# Altium PCB SATELLITE_4U_LASER_EXT_1.4.0.PcbDoc
Units mm, origin at the board's own origin, x right, y up, seen from the top; angles counter-clockwise.
Board outline 35.5 x 54.5 mm, 2 copper layers (Top Layer, Bottom Layer); 37 components, 23 nets, 230 pads, 13 vias.
Unrouted connection lines stored in the file: 51.
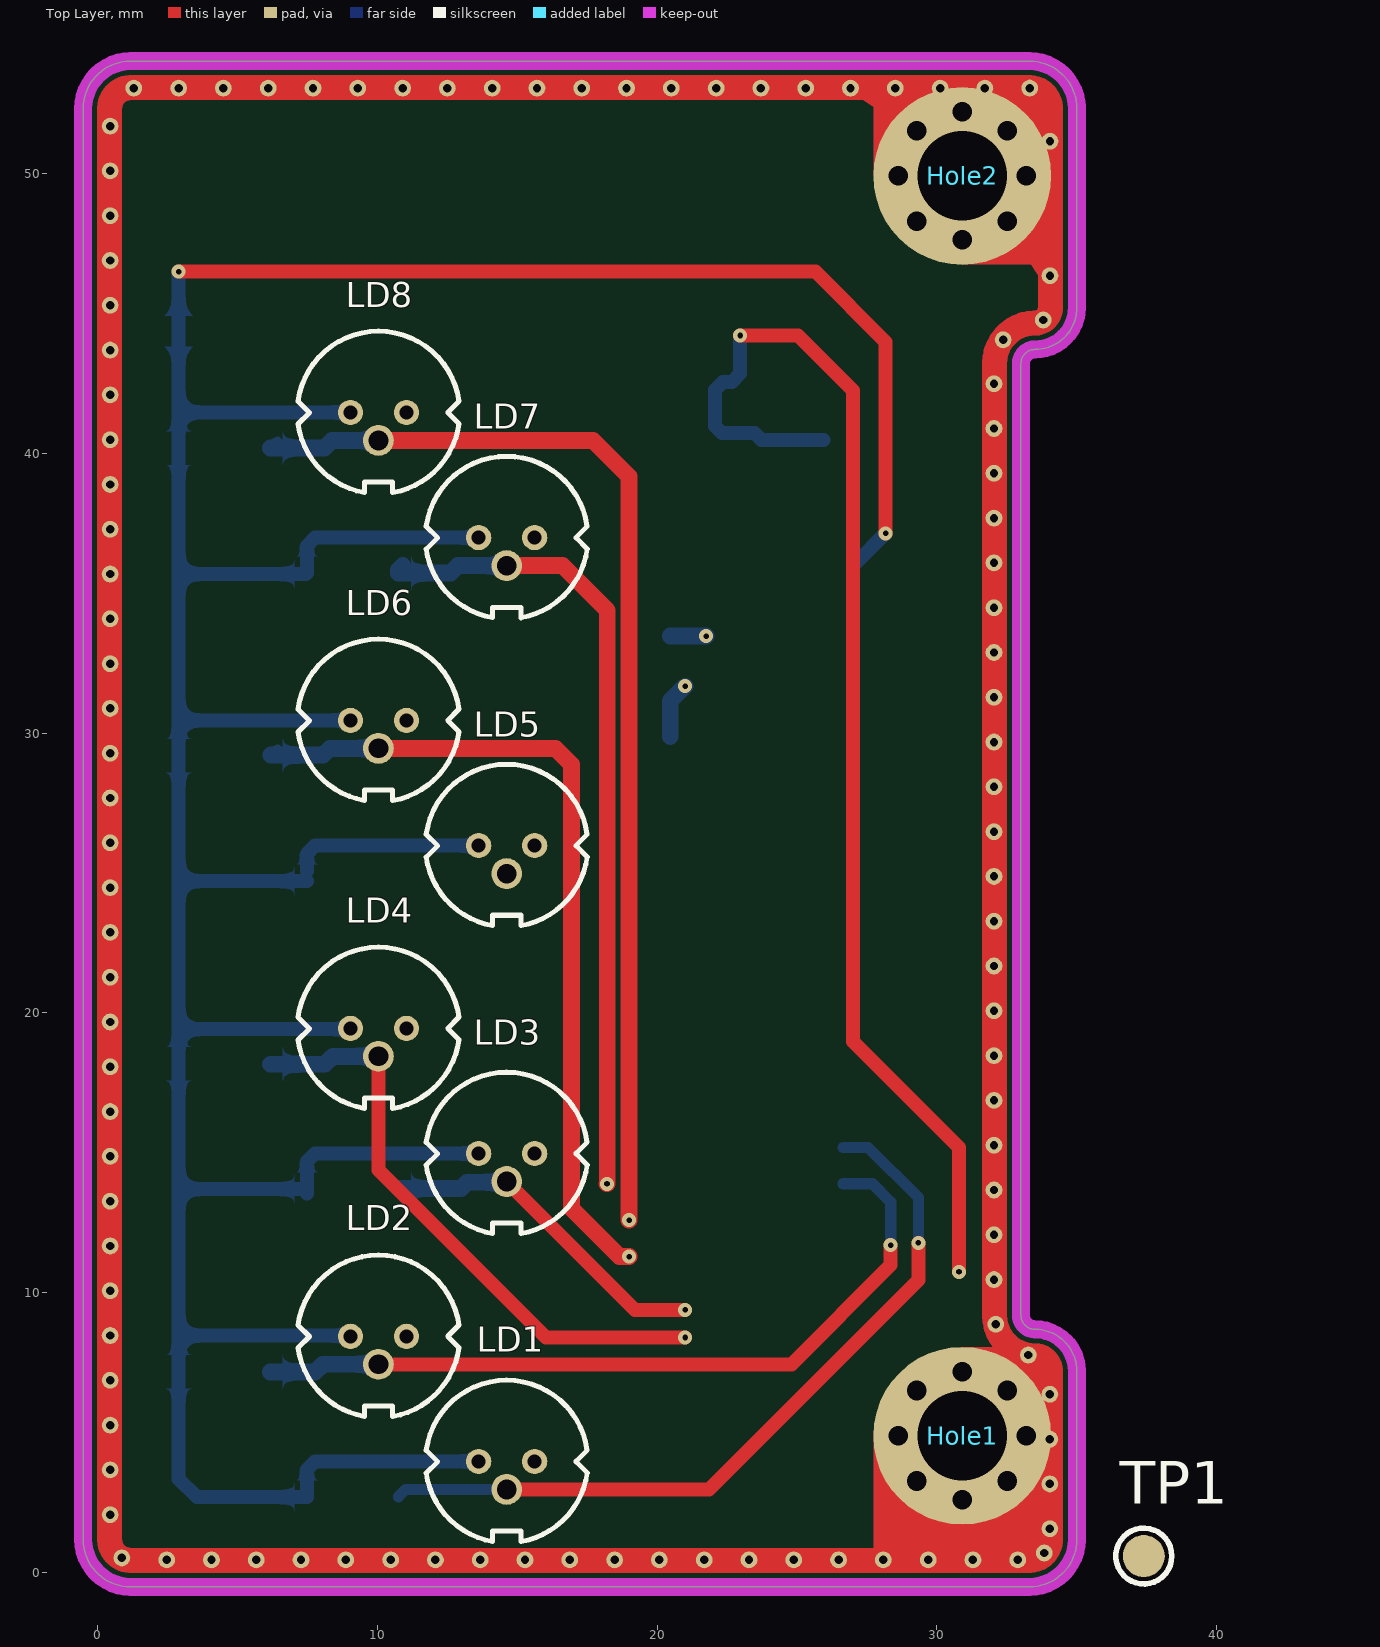
[diagram p0: Top Layer view]
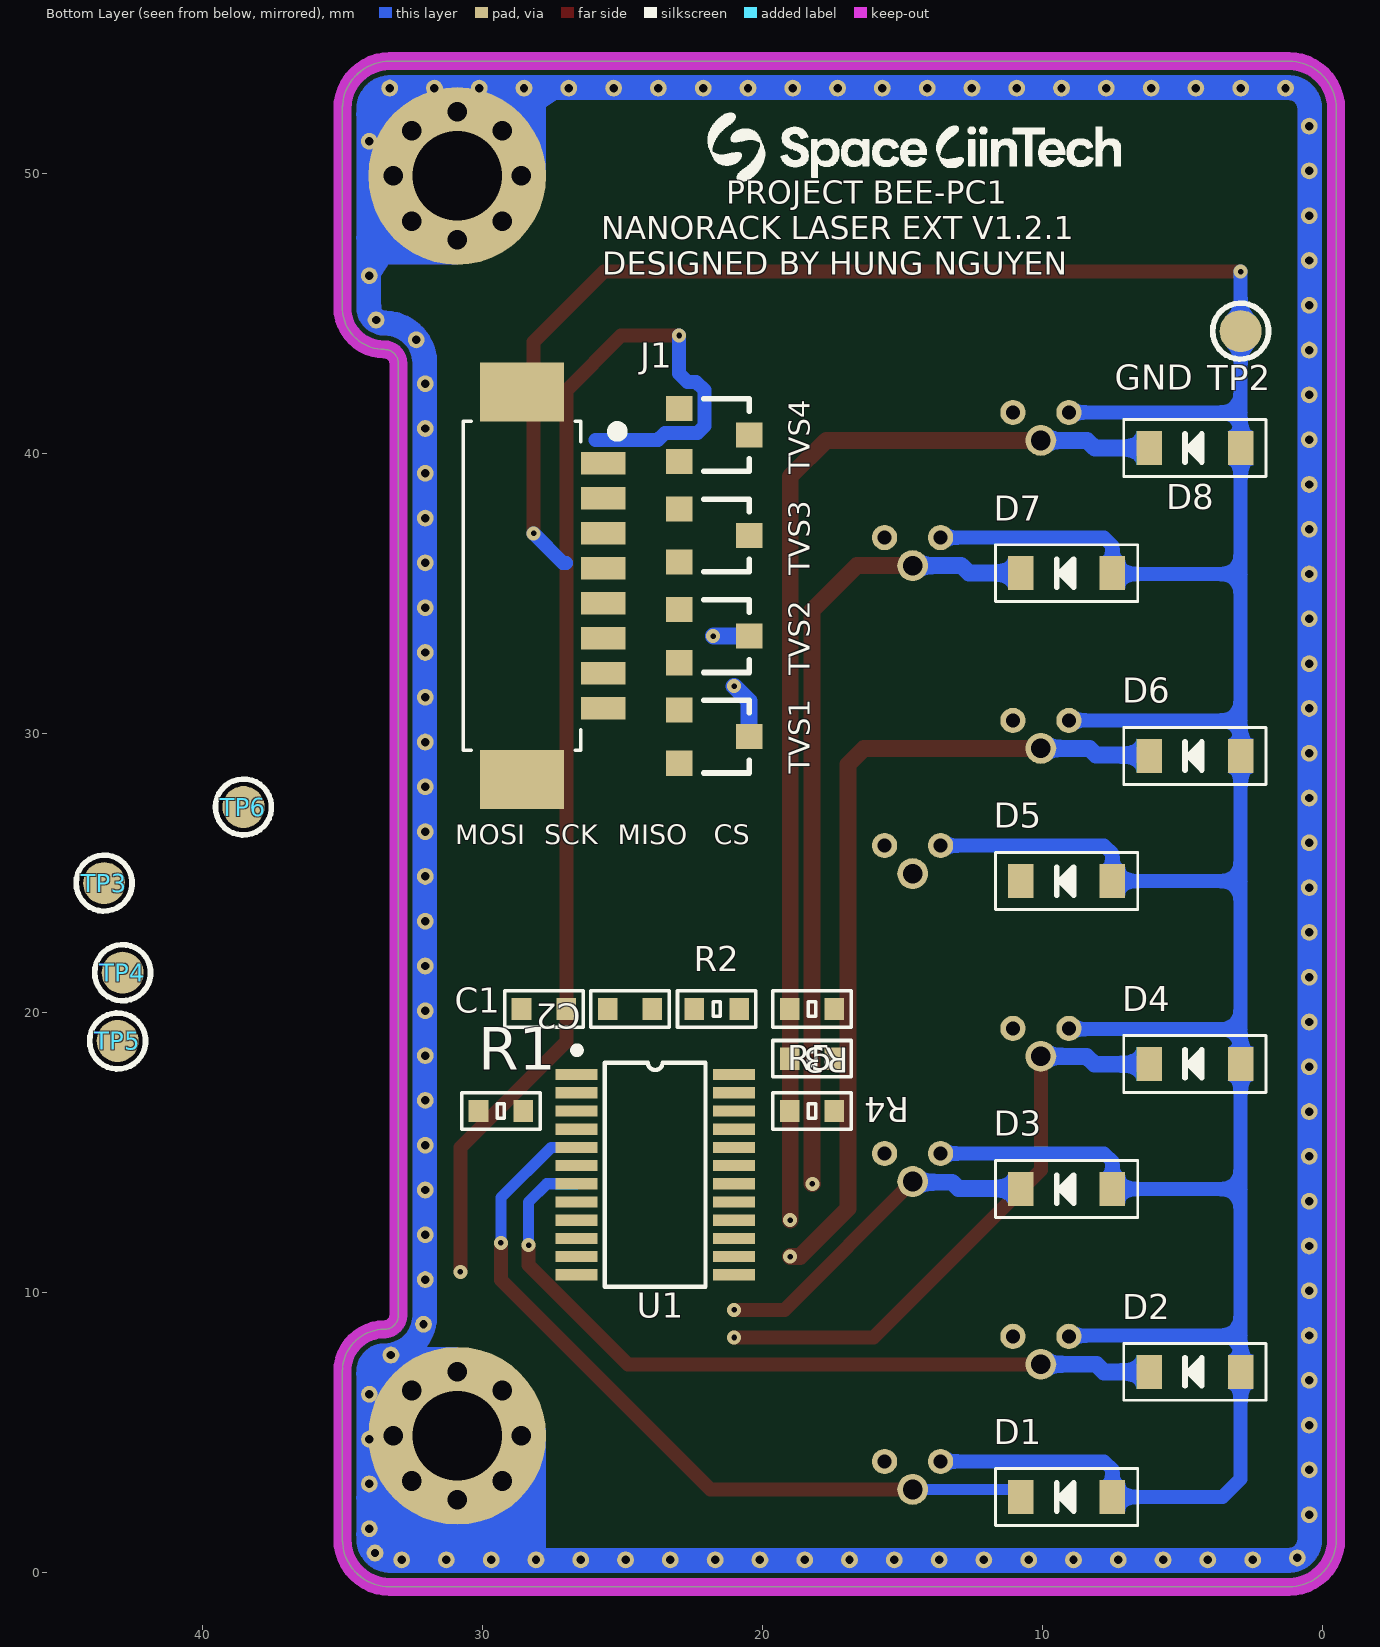
[diagram p1: Bottom Layer view, seen from below]

## Layer stack, top to bottom
Top Solder: solder mask 0.0102, Solder Resist, Dk 3.5
Top Layer: signal copper 0.0356
Dielectric 1: dielectric 0.32, FR-4, Dk 4.8
Bottom Layer: signal copper 0.0356
Bottom Solder: solder mask 0.0102, Solder Resist, Dk 3.5

## Board outline
-0.5,1.2 ccw(c1.2,1.2) 1.2,-0.5 33.3,-0.5 ccw(c33.3,1.2) 35,1.2 34.998,1.113 34.998,7.259 cw(c34.999,7.259) 34.999,7.26 35,7.2 ccw(c33.5,7.2) 33.5,8.7 cw(c33.5,9.2) 33,9.2 33,43.19 33,43.2 cw(c33.5,43.2) 33.499,43.7 33.5,43.7 ccw(c33.5,45.2) 35,45.2 35,45.176 35,52.399 ccw(c34.997,52.399) 34.997,52.402 35,52.3 ccw(c33.3,52.3) 33.3,54 1.2,54 ccw(c1.2,52.3) -0.5,52.3

## Design rules (kind name [scope] priority, off if disabled: settings)
Clearance [NOT InNet('PROTECT_EMI') and NOT OnLayer('Keep-Out Layer')] p1: gap=0.178 ignorepadtopadclearanceinfootprint=TRUE
HoleSize [All] p1: absolutevalues=TRUE maxlimit=3.2 minlimit=0.025 maxpercent=80.000 minpercent=20.000
MinimumSolderMaskSliver [All] p1: minsoldermaskwidth=0.14
PolygonConnect [All] p1: thpad.connectstyle=Relief thpad.reliefconductorwidth=0.254 thpad.reliefentries=4 thpad.polygonreliefangle="90 Angle" thpad.airgapwidth=0.254 smdpad.connectstyle=Relief smdpad.reliefconductorwidth=0.254 smdpad.reliefentries=4 smdpad.polygonreliefangle="90 Angle" smdpad.airgapwidth=0.254 via.connectstyle=Direct via.reliefconductorwidth=0.254 via.reliefentries=4 via.polygonreliefangle="90 Angle" via.airgapwidth=0.254
RoutingVias [All] p1: holewidth=0.3 width=0.7 viastyle="Through Hole" minholewidth=0.3 minwidth=0.6 maxholewidth=0.711 maxwidth=1.27
SilkToSolderMaskClearance [IsPad] p1: minsilkscreentomaskgap=0.15 clearancetoexposedcopper=TRUE
SolderMaskExpansion [All] p1: expansion=0.102 istentingtop=FALSE
SupplyNets "Schematic Supply Nets_3" [InNet('GND')] p1: voltage=0.000
SupplyNets "Schematic Supply Nets_2" [InNet('12V_EXP')] p2: voltage=0.000
SupplyNets "Schematic Supply Nets_1" [InNet('I_LD_EXT')] p3: voltage=0.000
SupplyNets "Schematic Supply Nets" [InNet('+3.3')] p4: voltage=0.000
Width [All] p1: maxlimit=1.27 minlimit=0.178 preferedwidth=0.381
27 further rules are at their usual default settings.

## Classes and differential pairs
component class COMMUNICATION: Hole1 Hole2 J1 TVS1 TVS2 TVS3 TVS4
component class SWITCH: C1 C2 D1 D2 D3 D4 D5 D6 D7 D8 LD1 LD2 LD3 LD4 LD5 LD6 LD7 LD8 q R1 R2 R3 R4 R5 TP1 TP2 TP3 TP4 TP5 TP6 U1

## Components (designator, comment, footprint, x,y, rotation, side; value= is the part's Value field where it differs from the comment)
C1 "0.22uF/25V" CN-SMD-0603 27.8,20.142 r0 bottom value=33pF
C2 "0.22uF/25V" CN-SMD-0603 24.727,20.142 r0 bottom value=33pF
D1 "1N4148W-TP" SOD123 9.13,2.71 r180 bottom value=1N5007
D2 "1N4148W-TP" SOD123 4.55,7.18 r180 bottom value=1N5007
D3 "1N4148W-TP" SOD123 9.13,13.71 r180 bottom value=1N5007
D4 "1N4148W-TP" SOD123 4.55,18.18 r180 bottom value=1N5007
D5 "1N4148W-TP" SOD123 9.13,24.71 r180 bottom value=1N5007
D6 "1N4148W-TP" SOD123 4.55,29.18 r180 bottom value=1N5007
D7 "1N4148W-TP" SOD123 9.13,35.71 r180 bottom value=1N5007
D8 "1N4148W-TP" SOD123 4.55,40.18 r180 bottom value=1N5007
Hole1 "Hole" "Hole space" 30.9,4.9 r0 top
Hole2 "Hole" "Hole space" 30.9,49.9 r0 top
J1 "0532610871" 0532610871 28.579,35.26 r270 bottom
LD1 "LaserDiode" LASER 14.63,3.98 r90 top
LD2 "LaserDiode" LASER 10.05,8.45 r90 top
LD3 "LaserDiode" LASER 14.63,14.98 r90 top
LD4 "LaserDiode" LASER 10.05,19.45 r90 top
LD5 "LaserDiode" LASER 14.63,25.98 r90 top
LD6 "LaserDiode" LASER 10.05,30.45 r90 top
LD7 "LaserDiode" LASER 14.63,36.98 r90 top
LD8 "LaserDiode" LASER 10.05,41.45 r90 top
R1 "22R 1%" RES-SMD-0603 29.337,16.499 r180 bottom
R2 "22R 1%" RES-SMD-0603 21.628,20.142 r0 bottom
R3 "22R 1%" RES-SMD-0603 18.224,20.142 r0 bottom
R4 "4.7K 1%" RES-SMD-0603 18.224,18.367 r0 bottom
R5 "22R 1%" RES-SMD-0603 18.224,16.499 r0 bottom
TP1 "" TESTPOINT 37.387,0.602 r0 top
TP2 "" TESTPOINT 2.915,44.354 r180 bottom
TP3 "" TESTPOINT 43.51,24.638 r0 bottom
TP4 "" TESTPOINT 42.85,21.438 r0 bottom
TP5 "" TESTPOINT 43.028,18.999 r0 bottom
TP6 "" TESTPOINT 38.532,27.356 r0 bottom
TVS1 "S2303" SOT23-123 21.721,29.87 r270 bottom
TVS2 "S2303" SOT23-123 21.721,33.462 r270 bottom
TVS3 "S2303" SOT23-123 21.721,37.054 r270 bottom
TVS4 "S2312" SOT23-123 21.721,40.645 r270 bottom
U1 "ADG1414BRUZ" TSSOP24 23.825,14.224 r180 bottom

## Footprints (in the part's own frame and the unit in brackets; to place one, negate y for a bottom-side part, rotate by r counter-clockwise, add the part's x,y. Pads: shape width x height; smd on the part's side, far side on the other; paste and mask are expansions set on the pad)
0532610871 [mm] "CONN HEADER SMD R/A 8POS 1.25MM"
  rect 0.8x1.6 smd: 1(-4.375,2.9) 2(-3.125,2.9) 3(-1.875,2.9) 4(-0.625,2.9) 5(0.625,2.9) 6(1.875,2.9) 7(3.125,2.9) 8(4.375,2.9)
  rect 2.1x3 smd: S1(-6.925,0) S2(6.925,0)
  silkscreen extent -5.87,-2.1 5.87,3.58, body extent -7.57,-1.8 7.57,3.4, height 3.2
CN-SMD-0603 [mm]
  rect 0.7x0.8 smd: 1(-0.8,0) 2(0.8,0)
  silkscreen extent -1.4,-0.65 1.4,0.65, body extent -0.8,-0.4 0.8,0.4, height 0.3
"Hole space" [mm]
  round 1 hole 0.7: 1(-2.286,0) 1(-1.616,-1.616) 1(-1.616,1.616) 1(0,-2.286) 1(0,2.286) 1(1.616,-1.616) 1(1.616,1.616) 1(2.286,0)
  round 6.35 hole 3.2: 1(0,0)
LASER [mm]
  round 1.1 hole 0.7 mask+0.102: 1(-1,0)
  round 0.9 hole 0.5 mask+0.102: 2(0,-1) 3(0,1)
  silkscreen extent -2.86,-2.88 2.9,2.87, body extent -2.76,-2.78 2.8,2.77, height 3.7
RES-SMD-0603 [mm]
  rect 0.7x0.8 smd: 1(-0.8,0) 2(0.8,0)
  silkscreen extent -1.4,-0.65 1.4,0.65, body extent -0.8,-0.4 0.8,0.4, height 0.43
SOD123 [mm]
  rect 0.91x1.22 smd: 1(1.635,0) 2(-1.635,0)
  silkscreen extent -2.54,-1.02 2.54,1.02, body extent -1.85,-0.8 1.85,0.8, height 1.25
SOT23-123 [mm] "SOT23, 1=bottom-left, 2=top, 3=bottom-right"
  rect 0.9x0.95 smd: 1(-0.95,-1.25) 2(0,1.25) 3(0.95,-1.25)
  silkscreen extent -1.3,-0.38 1.3,1.25, body extent -1.52,-1.23 1.48,1.27, height 1.06
TESTPOINT [mm]
  round 1.5 smd: 1(0,0)
  silkscreen extent -1,-1 1,1
TSSOP24 [mm] "TSSOP, 24-Leads, Body 7.80x4.40mm, Pitch 0.65mm, IPC High Density"
  rect 1.5x0.4 smd: 1(-2.819,3.575) 2(-2.819,2.925) 3(-2.819,2.275) 4(-2.819,1.625) 5(-2.819,0.975) 6(-2.819,0.325) 7(-2.819,-0.325) 8(-2.819,-0.975) 9(-2.819,-1.625) 10(-2.819,-2.275) 11(-2.819,-2.925) 12(-2.819,-3.575) 13(2.819,-3.575) 14(2.819,-2.925) 15(2.819,-2.275) 16(2.819,-1.625) 17(2.819,-0.975) 18(2.819,-0.325) 19(2.819,0.325) 20(2.819,0.975) 21(2.819,1.625) 22(2.819,2.275) 23(2.819,2.925) 24(2.819,3.575)
  silkscreen extent -2.91,-4 1.8,4.56, body extent -3.23,-3.95 3.23,3.95, height 1.25

## Part data
C1 C2: library part CN, "CAP CER 0.22UF 25V X7R 0603"
D1 D2 D3 D4 D5 D6 D7 D8: library part "Diode SMD", "DIODE STANDARD 100V 150MA SOD123", Code - JEDEC=DO-214-AB, Published=8-Jun-2000, Publisher="Altium Limited", Revision="July-2002: Re-released for DXP Platform."
J1: library part "Header8 - Shield", "CONN HEADER SMD R/A 8POS 1.25MM"
LD1 LD2 LD3 LD4 LD5 LD6 LD7 LD8: library part LASER
R1 R2 R3 R5: library part Res-SMD, "Resistor", Manufacturer="Generic Components", Class=Passive, Published=08/06/2000, Publisher="Altium Hobart Technology Centre"
R4: library part Res-SMD, "RES SMD 4.7K OHM 1% 1/10W 0603", Manufacturer="Generic Components", Class=Passive, Published=08/06/2000, Publisher="Altium Hobart Technology Centre"
TP1 TP2 TP3 TP4 TP5 TP6: library part "Test Point", "Test Point", Solder=NF
TVS1 TVS2 TVS3: "TVS DIODE 3.3VWM 8VC SOT233"
TVS4: library part S2315, "TVS DIODE 12VWM 19VC SOT233"
U1: "IC SW SPST-NOX8 11.5OHM 24TSSOP"

## Free pads (board coordinates)
  round 0.6 hole 0.3: 1(0.464,2.078) 1(0.464,3.678) 1(0.464,5.278) 1(0.464,6.878) 1(0.464,8.478) 1(0.464,10.078) 1(0.464,11.678) 1(0.464,13.278) 1(0.464,14.878) 1(0.464,16.478) 1(0.464,18.078) 1(0.464,19.678) 1(0.464,21.278) 1(0.464,22.878) 1(0.464,24.478) 1(0.464,26.078) 1(0.464,27.678) 1(0.464,29.278) 1(0.464,30.878) 1(0.464,32.478) 1(0.464,34.078) 1(0.464,35.678) 1(0.464,37.278) 1(0.464,38.878) 1(0.464,40.478) 1(0.464,42.078) 1(0.464,43.678) 1(0.464,45.278) 1(0.464,46.878) 1(0.464,48.478) 1(0.464,50.078) 1(0.464,51.678) 1(0.886,0.535) 1(1.311,53.036) 1(2.484,0.464) 1(2.911,53.036) 1(4.084,0.464) 1(4.511,53.036) 1(5.684,0.464) 1(6.111,53.036) 1(7.284,0.464) 1(7.711,53.036) 1(8.884,0.464) 1(9.311,53.036) 1(10.484,0.464) 1(10.911,53.036) 1(12.084,0.464) 1(12.511,53.036) 1(13.684,0.464) 1(14.111,53.036) 1(15.284,0.464) 1(15.711,53.036) 1(16.884,0.464) 1(17.311,53.036) 1(18.484,0.464) 1(18.911,53.036) 1(20.084,0.464) 1(20.511,53.036) 1(21.684,0.464) 1(22.111,53.036) 1(23.284,0.464) 1(23.711,53.036) 1(24.884,0.464) 1(25.311,53.036) 1(26.484,0.464) 1(26.911,53.036) 1(28.084,0.464) 1(28.511,53.036) 1(29.684,0.464) 1(30.111,53.036) 1(31.284,0.464) 1(31.711,53.036) 1(32.036,10.477) 1(32.036,12.077) 1(32.036,13.677) 1(32.036,15.277) 1(32.036,16.877) 1(32.036,18.477) 1(32.036,20.077) 1(32.036,21.677) 1(32.036,23.277) 1(32.036,24.877) 1(32.036,26.477) 1(32.036,28.077) 1(32.036,29.677) 1(32.036,31.277) 1(32.036,32.877) 1(32.036,34.477) 1(32.036,36.077) 1(32.036,37.677) 1(32.036,39.277) 1(32.036,40.877) 1(32.036,42.477) 1(32.1,8.878) 1(32.362,44.043) 1(32.884,0.464) 1(33.265,7.781) 1(33.311,53.037) 1(33.796,44.752) 1(33.833,0.711) 1(34.033,1.578) 1(34.033,3.178) 1(34.033,4.778) 1(34.033,6.378) 1(34.035,46.334) 1(34.035,51.134)

## Via types
v1: diameter 0.5, hole 0.2, Top Layer to Bottom Layer, tented both sides, 13 vias

## Nets (pads, with @x,y where several pads share a name; then routed paths per layer and width w, separated by ;. In a path a pad name is that pad's centre, name@x,y a point inside that pad or via, vN(x,y) a via of type N, cw(c..) or ccw(c..) an arc to the next point about the centre after c; other vN are vias at no path point)
12V_EXP: C1.2 J1.1 TVS4.1 TVS4.3 U1.2
+3.3: J1.4 R4.1 TVS3.1 TVS3.3
GND: C2.1 D1.1 D2.1 D3.1 D4.1 D5.1 D6.1 D7.1 D8.1 J1.2 J1.S1 J1.S2 LD1.3 LD2.3 LD3.3 LD4.3 LD5.3 LD6.3 LD7.3 LD8.3 TP2.1 TVS1.2 TVS2.2 TVS3.2 TVS4.2 U1.4 U1.21 | length 150.7
  Top Layer w0.5: v1(2.915,46.482) 25.654,46.482 28.169,43.967 v1(28.169,37.135)
  Bottom Layer w0.5: v1(2.915,46.482) TP2.1 2.915,41.45 ; D7.1@7.463,35.678 2.915,35.678 ; D3.1@7.495,13.555 7.495,14.687 7.788,14.98 LD3.3@13.36,14.98 ; D3.1 2.915,13.71 ; D5.1 2.915,24.71 ; D5.1@7.495,25.07 7.495,25.687 7.788,25.98 LD5.3@13.36,25.98 ; D7.1 7.495,36.687 7.788,36.98 LD7.3@13.36,36.98 ; LD6.3@8.75,30.45 2.915,30.45 ; LD2.3@8.752,8.478 2.915,8.478 ; LD4.3@8.752,19.422 2.915,19.422 ; LD8.3@8.773,41.45 2.915,41.45 ; LD1.3@13.36,3.98 7.788,3.98 7.495,3.687 D1.1 3.564,2.71 2.915,3.359 D2.1 2.915,8.478 ; 27.004,36.077 27.111,36.077 v1(28.169,37.135) ; 2.915,8.478 2.915,13.71 ; 2.915,13.71 D4.1 2.915,19.422 ; 2.915,19.422 2.915,24.71 ; 2.915,24.71 D6.1 2.915,30.45 ; 2.915,30.45 2.915,35.678 ; 2.915,35.678 D8.1 2.915,41.45
  Bottom Layer w0.6: TVS1.2 20.471,31.139 v1(21.006,31.674) ; TVS2.2 v1(21.753,33.462)
I_LD_EXT: J1.3 U1.6 U1.8 U1.10 U1.12 U1.13 U1.15 U1.17 U1.19 | length 45.8
  Top Layer w0.5: v1(22.971,44.2) 25.043,44.2 27,42.242 27,18.974 30.785,15.189 v1@30.785,10.77
  Bottom Layer w0.5: v1(22.971,44.2) 22.971,42.838 22.678,42.545 22.361,42.545 22.068,42.252 22.068,40.968 22.32,40.715 23.481,40.715 23.734,40.463 25.954,40.463
  other v1: 30.785,10.755
MOSI_LD: J1.6 R1.1 TP1.1 TVS2.3
NetC1_1: C1.1 C2.2
NetD1_2: D1.2 LD1.1 U1.5 | length 28.2
  Top Layer w0.5: LD1.1 21.852,2.98 29.337,10.465 v1(29.337,11.786)
  Bottom Layer w0.4: D1.2 10.765,2.725 11.02,2.98 LD1.1 ; U1.5 27.539,15.199 29.337,13.401 v1(29.337,11.786)
NetD2_2: D2.2 LD2.1 U1.7 | length 28
  Top Layer w0.5: LD2.1 24.798,7.45 28.346,10.998 v1(28.346,11.709)
  Bottom Layer w0.4: U1.7 27.696,13.899 28.346,13.249 v1(28.346,11.709)
  Bottom Layer w0.6: D2.2 7.79,7.18 8.06,7.45 LD2.1
NetD3_2: D3.2 LD3.1 U1.9 | length 12.3
  Top Layer w0.5: LD3.1 19.212,9.398 v1(21.006,9.398)
  Bottom Layer w0.279: D3.2 D3.2@10.873,13.818
  Bottom Layer w0.6: D3.2@10.785,13.73 12.993,13.73 13.214,13.95 LD3.1@14.6,13.95
NetD4_2: D4.2 LD4.1 U1.11 | length 21.6
  Top Layer w0.5: LD4.1 10.05,14.385 16.027,8.407 v1(21.006,8.407)
  Bottom Layer w0.279: D4.2 D4.2@6.268,18.263
  Bottom Layer w0.6: D4.2@6.196,18.169 8.136,18.169 8.417,18.45 LD4.1
NetD5_2: D5.2 LD5.1 TP6.1 U1.20
NetD6_2: D6.2 LD6.1 U1.14 | length 30.1
  Top Layer w0.6: LD6.1 16.372,29.45 16.942,28.88 16.942,13.009 18.652,11.299 v1(19.002,11.299)
  Bottom Layer w0.279: D6.2 6.215,29.21 D6.2@6.455,29.45
  Bottom Layer w0.6: D6.2@6.215,29.21 8.077,29.21 8.317,29.45 LD6.1
NetD7_2: D7.2 LD7.1 U1.18 | length 29.1
  Top Layer w0.6: LD7.1 16.623,35.98 18.224,34.379 18.224,13.911 v1(18.212,13.899)
  Bottom Layer w0.6: D7.2@10.92,35.98 10.765,35.825 D7.2 10.767,35.712 12.624,35.712 12.891,35.98 LD7.1
NetD8_2: D8.2 LD8.1 U1.16 | length 40.4
  Top Layer w0.6: LD8.1 17.716,40.45 19.002,39.164 v1(19.002,12.599)
  Bottom Layer w0.279: D8.2 D8.2@6.455,40.45
  Bottom Layer w0.6: D8.2 8.125,40.18 8.395,40.45 LD8.1
NetR1_2: R1.2 U1.3
NetR2_2: R2.2 U1.1
NetR3_2: R3.2 U1.24
NetR4_2: R4.2 U1.23
NetR5_1: R5.1 TP5.1
NetR5_2: R5.2 U1.22
PROTECT_EMI: Hole1.1 Hole2.1 pad.1 | length 346.7
  Top Layer w0.889: 32.056,43.19 32.056,9.2 ccw(c33.5,9.2) 33.5,7.756 cw(c33.5,7.2) 34.053,7.249 34.053,1.142 cw(c33.3,1.2) 33.3,0.445 1.2,0.445 cw(c1.2,1.2) 0.445,1.2 0.445,52.3 cw(c1.2,52.3) 1.2,53.056 33.3,53.056 cw(c33.3,52.3) 34.053,52.358 ; 32.056,43.204 cw(c33.5,43.2) 33.497,44.644 ; 33.501,44.644 ccw(c33.5,45.2) 34.053,45.144 ; 34.052,45.176 cw(c34.997,45.176) 34.055,45.252 34.055,52.316
  Bottom Layer w0.889: 32.056,43.19 32.056,9.2 ccw(c33.5,9.2) 33.5,7.756 cw(c33.5,7.2) 34.053,7.249 34.053,1.142 cw(c33.3,1.2) 33.3,0.445 1.2,0.445 cw(c1.2,1.2) 0.445,1.2 0.445,52.3 cw(c1.2,52.3) 1.2,53.056 33.3,53.056 cw(c33.3,52.3) 34.053,52.358 ; 32.056,43.204 cw(c33.5,43.2) 33.497,44.644 ; 33.501,44.644 ccw(c33.5,45.2) 34.053,45.144 ; 34.052,45.176 cw(c34.997,45.176) 34.055,45.252 34.055,52.316
SCK_LD: J1.5 R2.1 TP3.1 TVS2.1
SW_EXT_CS: J1.8 R3.1 TP4.1 TVS1.1 TVS1.3
pads on no net: J1.7 LD1.2 LD2.2 LD3.2 LD4.2 LD5.2 LD6.2 LD7.2 LD8.2

## Keep-outs
Keep-Out Layer:
  lines w0.644: 33,43.19 33,9.2 ccw(c33.5,9.2) 33.5,8.7 cw(c33.5,7.2) 35,7.2 ; 33,43.2 cw(c33.5,43.2) 33.499,43.7 ; 33.5,43.7 ccw(c33.5,45.2) 35,45.2 ; 34.997,45.176 ccw(c35,45.176) 35,45.173 ; 34.997,52.402 cw(c34.997,52.399) 35,52.399 35,45.176 ; 34.997,52.405 cw(c34.997,52.402) 35,52.402 ; 34.998,1.113 34.998,7.259 cw(c34.999,7.259) 34.999,7.26 ; 35,1.2 cw(c33.3,1.2) 33.3,-0.5 1.2,-0.5 cw(c1.2,1.2) -0.5,1.2 -0.5,52.3 cw(c1.2,52.3) 1.2,54 33.3,54 cw(c33.3,52.3) 35,52.3

## Other copper
Top Layer:
  rectangle net PROTECT_EMI: 30.836,3.489 33.706,8.077
  rectangle net PROTECT_EMI: 30.9,46.736 34.055,48.6
  rectangle net PROTECT_EMI: 27.725,49.9 34.055,53.056
  rectangle net PROTECT_EMI: 27.725,0.445 31.648,5.055
  rectangle net PROTECT_EMI: 30.9,0.445 34.053,6.775
Bottom Layer:
  rectangle net PROTECT_EMI: 27.725,49.9 34.055,53.056
  region net PROTECT_EMI: 33.731,4.382 33.731,8.077 30.9,8.077 30.9,4.382
  rectangle net PROTECT_EMI: 27.725,0.445 30.9,5.182
  rectangle net PROTECT_EMI: 30.9,0.445 34.053,6.775
  rectangle net PROTECT_EMI: 30.9,46.736 34.055,48.6

## Silkscreen, mask and mechanical layers (free items; w line width, h text height)
Bottom Overlay:
  drawing of 17 lines, arcs and shapes, not listed
  text "PROJECT BEE-PC1" at 21.285,48.641 h1.4
  text "NANORACK LASER EXT V1.2.1" at 25.76,47.368 h1.4
  text "DESIGNED BY HUNG NGUYEN" at 25.718,46.101 h1.4
  text "GND" at 7.417,41.952 h1.52
  text "CS" at 21.732,25.794 h1.2
  text "MISO" at 25.171,25.794 h1.2
  text "SCK" at 27.788,25.794 h1.2
  text "MOSI" at 30.963,25.794 h1.2